# Altium PCB PCB1.PcbDoc
Units mm, origin at the board's own origin, x right, y up, seen from the top; angles counter-clockwise.
Board outline 20 x 20 mm, 2 copper layers (Top Layer, Bottom Layer); 6 components, 8 nets, 21 pads, 32 vias.
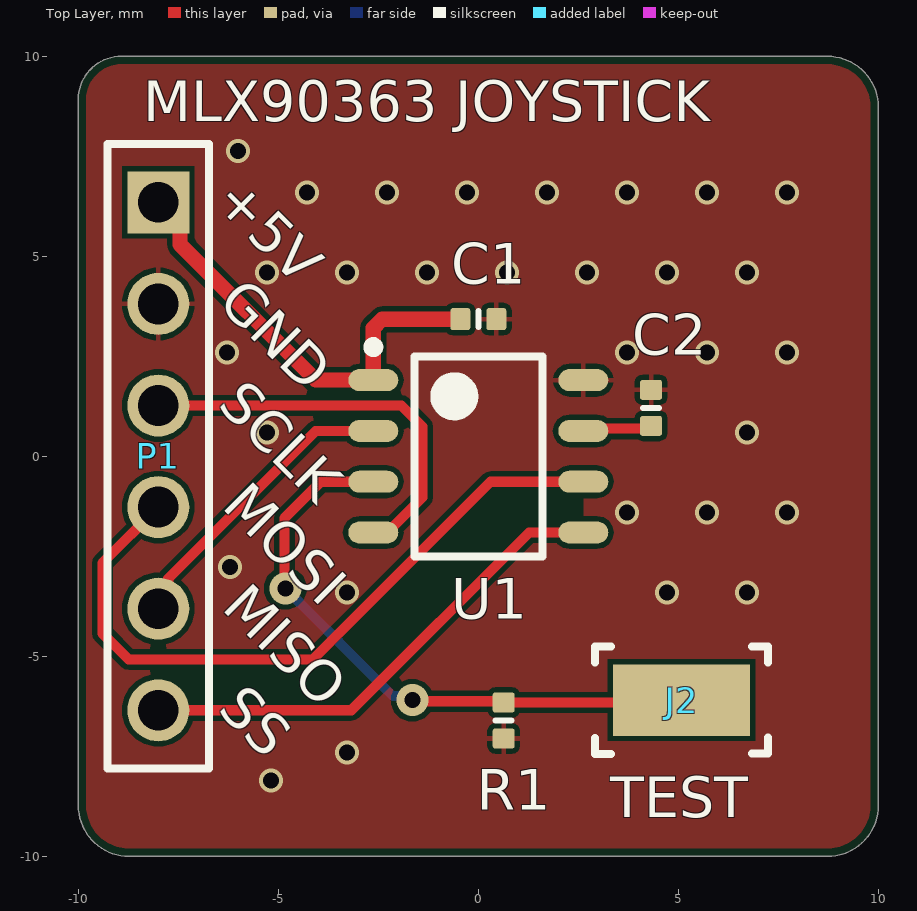
[diagram p0: Top Layer view]
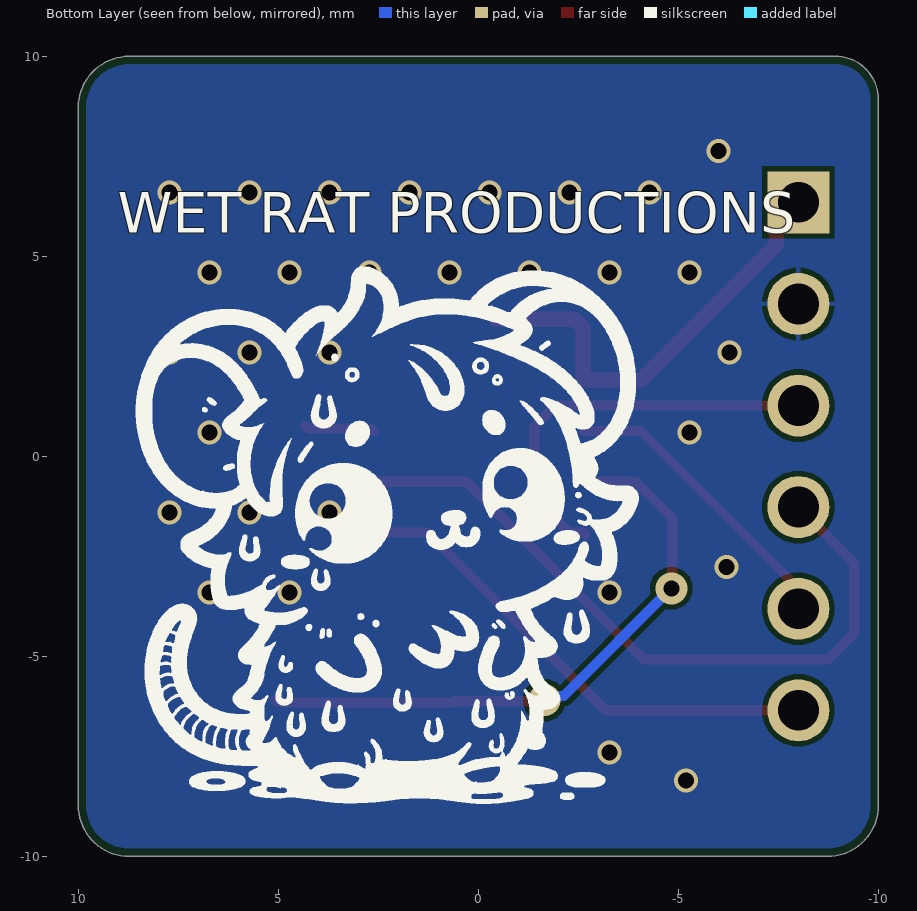
[diagram p1: Bottom Layer view, seen from below]
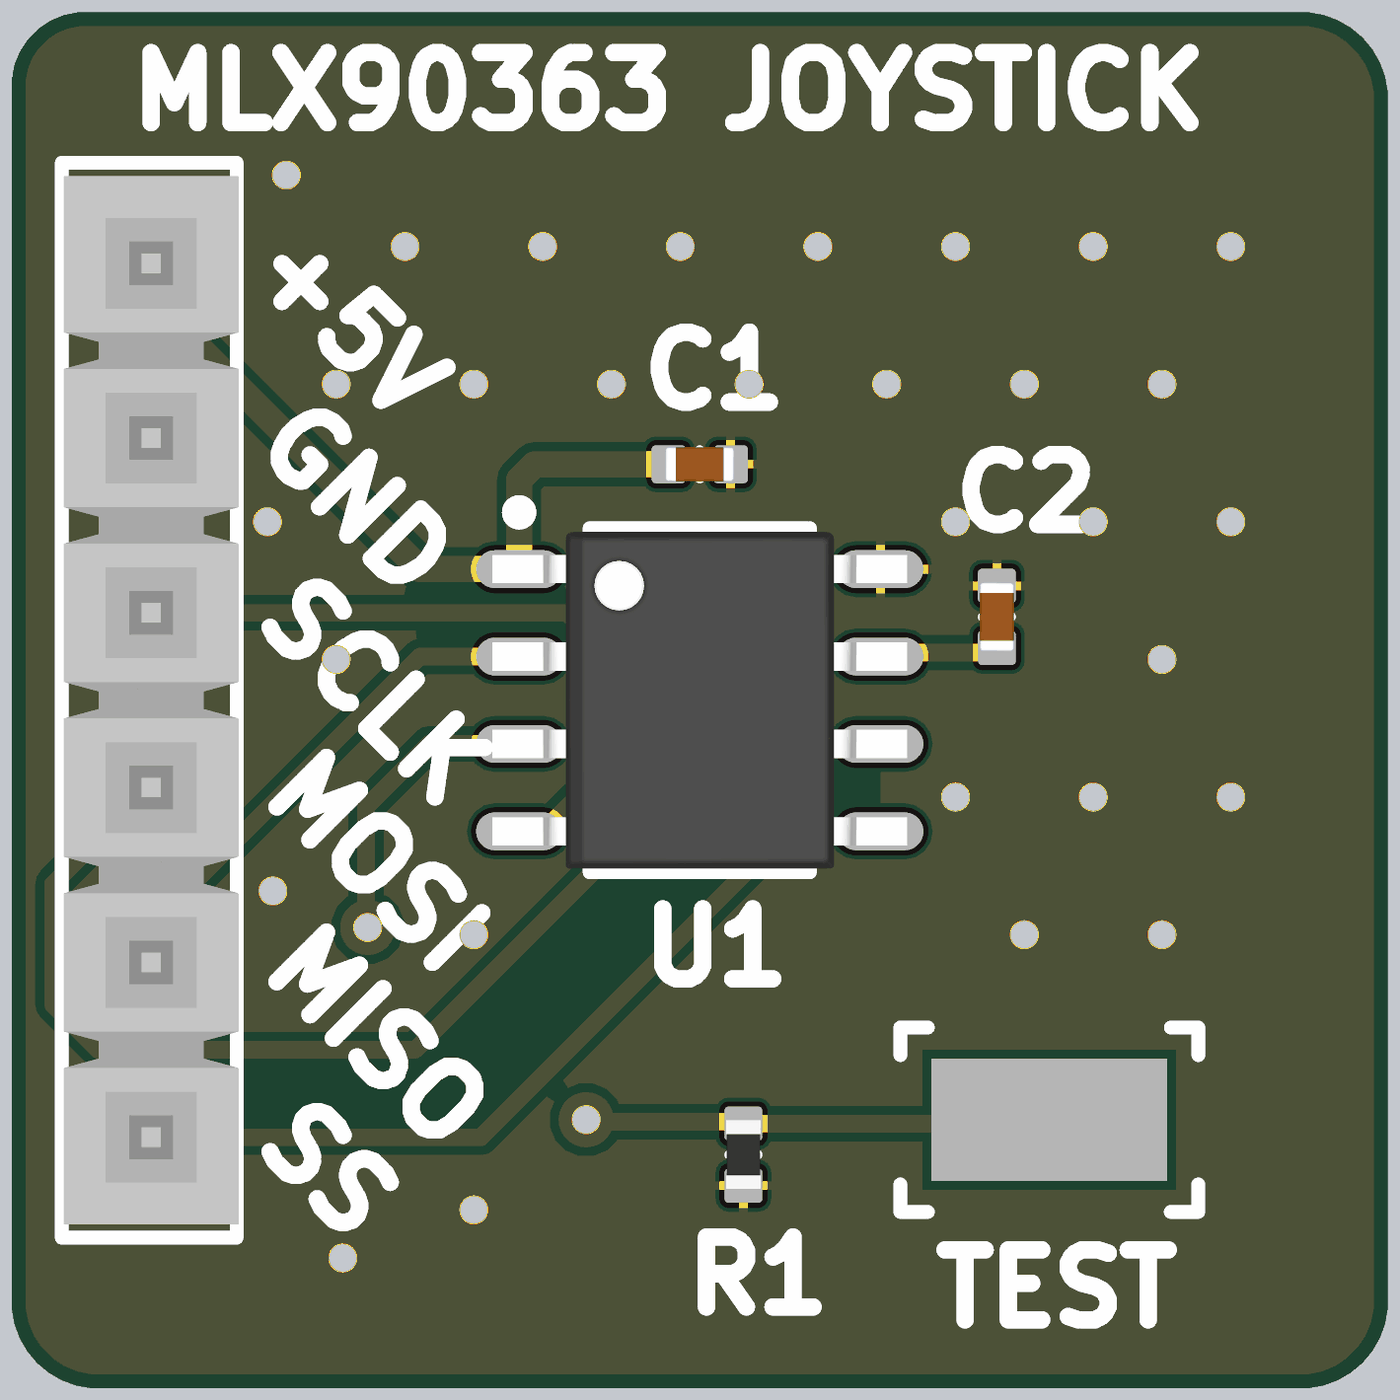
[diagram p2: 3D render of the assembled board from above, using the file's embedded part models]

## Layer stack, top to bottom
Top Solder: solder mask 0.0102, Solder Resist, Dk 3.5
Top Layer: signal copper 0.0356
Dielectric 1: dielectric 0.32, FR-4, Dk 4.8
Bottom Layer: signal copper 0.0356
Bottom Solder: solder mask 0.0102, Solder Resist, Dk 3.5

## Board outline
-10,-8.73 ccw(c-8.73,-8.73) -8.73,-10 8.73,-10 ccw(c8.73,-8.73) 10,-8.73 10,8.73 ccw(c8.73,8.73) 8.73,10 -8.927,10 ccw(c-8.927,8.927) -10,8.927

## Design rules (kind name [scope] priority, off if disabled: settings)
BoardOutlineClearance [All] p1: gap=0.2 ignorepadtopadclearanceinfootprint=FALSE
Clearance [All] p1: gap=0.127 ignorepadtopadclearanceinfootprint=FALSE except(0.25: Arc-Hole Track-Hole SMDPad-Hole THPad-Hole Via-Hole Fill-Hole Poly-Hole Region-Hole Text-Hole)
ComponentClearance [All] p1: gap=0.127 collisioncheckmode=3 verticalgap=0.127 showdistances=TRUE
DiffPairsRouting [All] p1: maxlimit=0.254 minlimit=0.127 mostfreqgap=0.127 toplayer_minwidth=0.127 toplayer_maxwidth=25.4 toplayer_prefwidth=0.127 bottomlayer_minwidth=0.127 bottomlayer_maxwidth=25.4 bottomlayer_prefwidth=0.127 maxuncoupledlength=12.7
Height [All] p1: minheight=0 maxheight=1816.048 prefheight=12.7
HoleSize [All] p1: absolutevalues=TRUE maxlimit=6.3 minlimit=0.3 maxpercent=80.000 minpercent=20.000
HoleToHoleClearance [All] p1: gap=0.25 allowstackedmicrovias=FALSE
MinimumAnnularRing [All] p1: minimumring=0.076
MinimumSolderMaskSliver [All] p1: minsoldermaskwidth=0
PlaneClearance [All] p1: clearance=0.127
PlaneConnect PlaneConnectPowerPads [InPadClass('PowerPads')] p1: planeconnectstyle=Direct reliefexpansion=0.508 reliefentries=4 reliefconductorwidth=0.254 reliefairgap=0.254
PlaneConnect [All] p2: pad.planeconnectstyle=Relief pad.reliefexpansion=0.3 pad.reliefentries=4 pad.reliefconductorwidth=0.127 pad.reliefairgap=0.127 via.planeconnectstyle=Direct via.reliefexpansion=0.3 via.reliefentries=4 via.reliefconductorwidth=0.127 via.reliefairgap=0.127
PolygonConnect PolygonConnectPowerPads [All vs (InPadClass('PowerPads'))] p1: connectstyle=Direct reliefconductorwidth=0.254 reliefentries=4 polygonreliefangle="90 Angle" airgapwidth=0.254
PolygonConnect [All] p2: thpad.connectstyle=Relief thpad.reliefconductorwidth=0.127 thpad.reliefentries=4 thpad.polygonreliefangle="90 Angle" thpad.airgapwidth=0.127 smdpad.connectstyle=Relief smdpad.reliefconductorwidth=0.127 smdpad.reliefentries=4 smdpad.polygonreliefangle="90 Angle" smdpad.airgapwidth=0.127 via.connectstyle=Direct via.reliefconductorwidth=0.127 via.reliefentries=4 via.polygonreliefangle="90 Angle" via.airgapwidth=0.127
RoutingVias [All] p1: holewidth=0.3 width=0.6 viastyle="Through Hole" minholewidth=0.3 minwidth=0.6 maxholewidth=0.6 maxwidth=6.6
SilkToSilkClearance [All] p1: silktosilkclearance=0
SilkToSolderMaskClearance [IsPad] p1: minsilkscreentomaskgap=0.127 clearancetoexposedcopper=TRUE
SolderMaskExpansion [All] p1: expansion=0.075 istentingtop=FALSE
Width [All] p1: maxlimit=25.4 minlimit=0.127 preferedwidth=0.127 minimp=50.000000 maximp=50.000000 favimp=50.000000
20 further rules are at their usual default settings.

## Classes and differential pairs
component class MLX90363: C1 C2 J2 P1 U1

## Components (designator, comment, footprint, x,y, rotation, side; value= is the part's Value field where it differs from the comment)
C1 "Capacitor 100nF +/-20% 25V 0402" CAPC0402(1005)60_L 0,3.429 r0 top value=100nF
C2 "Capacitor 47nF +/-20% 50V 0402" CAPC0402(1005)60_L 4.318,1.212 r270 top value=47nF
J2 "5015" FP-5015-MFG 5.08,-6.096 r0 top
P1 "TSW-106-07-G-S" SMTC-TSW-106-07-X-S -8.001,6.35 r270 top
R1 "0R2J" RESC0402(1005)_L 0.635,-6.604 r270 top value=0
U1 "MLX90363KDC-ABB-000-RE" MEX-DC-8_L 0,0 r0 top

## Footprints (in the part's own frame and the unit in brackets; to place one, negate y for a bottom-side part, rotate by r counter-clockwise, add the part's x,y. Pads: shape width x height; smd on the part's side, far side on the other; paste and mask are expansions set on the pad)
CAPC0402(1005)60_L [mm] "Chip Capacitor, Body 1.0x0.5mm, Height 0.6mm, IPC High Density"
  rrect25% 0.5x0.55 smd: 1(-0.45,0) 2(0.45,0)
  silkscreen extent 0,-0.2 0,0.2, body extent -0.5,-0.25 0.5,0.25, height 0.6
FP-5015-MFG [mm]
  rect 3.43x1.78 smd paste+0 mask+0: 1(0,0)
  silkscreen extent -2.16,-1.34 2.17,1.34
MEX-DC-8_L [mm] "SOIC, 8-Leads, Body 5x4mm, Pitch 1.27mm, IPC High Density"
  oval 1.25x0.55 smd: 1(-2.625,1.905) 2(-2.625,0.635) 3(-2.625,-0.635) 4(-2.625,-1.905) 5(2.625,-1.905) 6(2.625,-0.635) 7(2.625,0.635) 8(2.625,1.905)
  silkscreen extent -2.75,-2.5 1.6,2.85, body extent -3.01,-2.44 3.01,2.45, height 1.72
RESC0402(1005)_L [mm] "Chip Resistor, Body 1.0x0.5mm, IPC High Density"
  rrect25% 0.5x0.55 smd: 1(-0.45,0) 2(0.45,0)
  silkscreen extent 0,-0.2 0,0.2, body extent -0.5,-0.25 0.5,0.25, height 0.3
SMTC-TSW-106-07-X-S [mm] ".025 SQ Post Terminal Strip Assembly, 1x6 Pins, Vertical, 2.54mm Pitch, Male"
  rect 1.55x1.55 hole 1.02: 1(0,0)
  round 1.55 hole 1.02: 2(2.54,0) 3(5.08,0) 4(7.62,0) 5(10.16,0) 6(12.7,0)
  silkscreen extent -1.46,-1.27 14.16,1.27, body extent -1.27,-1.24 13.97,1.3, height 8.38

## Part data
C1: library part CMP-001-00065-4, "Chip Capacitor, 100nF +/-20%, 25V, 0402, Thickness 0.6 mm", Case/Package=0402, Max Operating Temperature=85°C, Min Operating Temperature=-55°C, Tolerance=10%, Voltage Rating=25V, Mounting Technology=SMT, Pins=2
C2: library part CMP-001-00071-4, "Chip Capacitor, 47nF +/-20%, 50V, 0402, Thickness 0.6 mm", Case/Package=0402, Max Operating Temperature=85°C, Min Operating Temperature=-55°C, Tolerance=20%, Voltage Rating=50V, Mounting Technology=SMT, Pins=2
J2: library part CMP-00028-00007-1, "Test Point Micro Mini SMT Phos Bronze/Silver 1000pc Tape & Reel", Color=White, Package Quantity=1, Body Material=Bronze, Contact Material=Bronze, Contact Plating=Silver, Height=0.06inch, Lead Free="Lead Free", Length=0.105inch, Material=Bronze,Silver, Mounting Technology="Surface Mount", Number of Contacts=1, Packaging="Tape and Reel", Plating=Silver, Reach SVHC Compliant=No, RoHS Compliant=Yes, Series=-, Termination=SMD/SMT, Thickness=0.01inch
P1: library part CMP-002-00075-1, "Conn Unshrouded Header HDR 6 POS 2.54mm Solder ST Top Entry Thru-Hole Bag"
R1: library part CMP-009-00062-2, "Jumper 0402 (1005 Metric)", Case/Package=0402, Mounting Technology=SMT, Pins=2
U1: library part CMP-001-0000-1, "Hall Effect Sensor, 20mT Min, 70mT Max, 0.4-2.9V, CMOS, Rectangular, 8 Pin, Surface Mount"

## Via types
v1: diameter 0.6, hole 0.4, Top Layer to Bottom Layer, tented both sides, 30 vias
v2: diameter 0.8, hole 0.4, Top Layer to Bottom Layer, tented top, 2 vias

## Nets (pads, with @x,y where several pads share a name; then routed paths per layer and width w, separated by ;. In a path a pad name is that pad's centre, name@x,y a point inside that pad or via, vN(x,y) a via of type N, cw(c..) or ccw(c..) an arc to the next point about the centre after c; other vN are vias at no path point)
MISO: P1.5 U1.2 | length 7.5
  Top Layer w0.254: P1.5 -7.753,-3.562 -7.753,-3.054 -4.064,0.635 U1.2
MOSI: P1.4 U1.6 | length 17.9
  Top Layer w0.254: P1.4 -9.398,-2.667 -9.398,-4.423 -8.741,-5.08 -4.14,-5.08 0.305,-0.635 U1.6
SCLK: P1.3 U1.4 | length 10.3
  Top Layer w0.254: P1.3 -1.927,1.27 -1.397,0.74 -1.397,-1.027 -2.275,-1.905 U1.4 U1.4@-2.682,-1.962
SS: P1.6 U1.5 | length 12.5
  Top Layer w0.254: P1.6 -3.175,-6.35 1.27,-1.905 U1.5
TEST: J2.1 R1.1 U1.3 | length 15.6
  Top Layer w0.254: v2(-4.826,-3.302) -4.849,-3.279 -4.849,-1.547 -3.937,-0.635 U1.3 ; v2(-1.651,-6.096) -1.622,-6.125 0.606,-6.125 R1.1 5.022,-6.154 J2.1
  Bottom Layer w0.254: v2(-4.826,-3.302) -2.136,-5.992 -1.755,-5.992 v2(-1.651,-6.096) v2@-1.799,-6.096
VDD: C1.1 P1.1 U1.1 | length 11.1
  Top Layer w0.381: P1.1 -7.457,5.806 -7.457,5.298 -4.064,1.905 U1.1 -2.625,3.206 -2.402,3.429 C1.1
VDEC: C2.2 U1.7 | length 1.7
  Top Layer w0.254: U1.7 2.682,0.692 4.248,0.692 C2.2
VSS: C1.2 C2.1 P1.2 R1.2 U1.8
  other v1: -5.188,-8.106 -3.283,-7.407 -3.283,-3.407 4.717,-3.407 6.717,-3.407 -6.204,-2.772 3.717,-1.407 5.717,-1.407 7.717,-1.407 -5.283,0.593 6.717,0.593 -6.283,2.593 3.717,2.593 5.717,2.593 7.717,2.593 -5.283,4.593 -3.283,4.593 -1.283,4.593 0.717,4.593 2.717,4.593 4.717,4.593 6.717,4.593 -4.283,6.593 -2.283,6.593 -0.283,6.593 1.717,6.593 3.717,6.593 5.717,6.593 7.717,6.593 -6.008,7.631

## Polygon pours and split planes (outlines as drawn)
VSS on Bottom Layer "VSS_L02_P001" (solid, pour order 1): -12.446,11.43 -12.446,-11.43 11.303,-11.43 11.303,11.43
VSS on Top Layer "VSS_L01_P000" (solid, pour order 0): -11.303,10.795 -11.303,-11.43 11.43,-11.43 11.43,10.795

## Other copper
Top Layer:
  pour cut-out: -7.979,-5.08 -4.14,-5.08 0.305,-0.635 2.625,-0.635 2.625,-1.905 1.27,-1.905 -3.175,-6.35 -8.001,-6.35

## Silkscreen, mask and mechanical layers (free items; w line width, h text height)
Top Overlay:
  text "MLX90363 JOYSTICK" at -8.382,8.382 h1.02
  text "+5V" at -6.642,6.35 h1.02 r315
  text "GND" at -6.542,3.81 h1.02 r315
  text "SCLK" at -6.542,1.27 h1.02 r315
  text "MOSI" at -6.442,-1.27 h1.02 r315
  text "MISO" at -6.442,-3.81 h1.02 r315
  text "SS" at -6.542,-6.35 h1.02 r315
  text "TEST" at 3.302,-9.017 h1.02
Bottom Overlay:
  drawing of 45 lines, arcs and shapes, not listed
  text "WET RAT PRODUCTIONS" at 9.017,5.588 h1.02
Mechanical 1:
  lines w0.1: -10,-8.73 ccw(c-8.73,-8.73) -8.73,-10 -6.191,-10 7.432,-10 8.73,-10 ccw(c8.73,-8.73) 10,-8.73 10,5.236 10,8.73 ccw(c8.73,8.73) 8.73,10 -8.927,10 ccw(c-8.927,8.927) -10,8.927 -10,-8.73